# Altium PCB RGB_LED MATRIX.PcbDoc
Units mm, origin at the board's own origin, x right, y up, seen from the top; angles counter-clockwise.
Board outline 50 x 50 mm, 2 copper layers (Top Layer, Bottom Layer), stack 1.595 mm thick; 113 components, 165 nets, 371 pads, 25 vias.
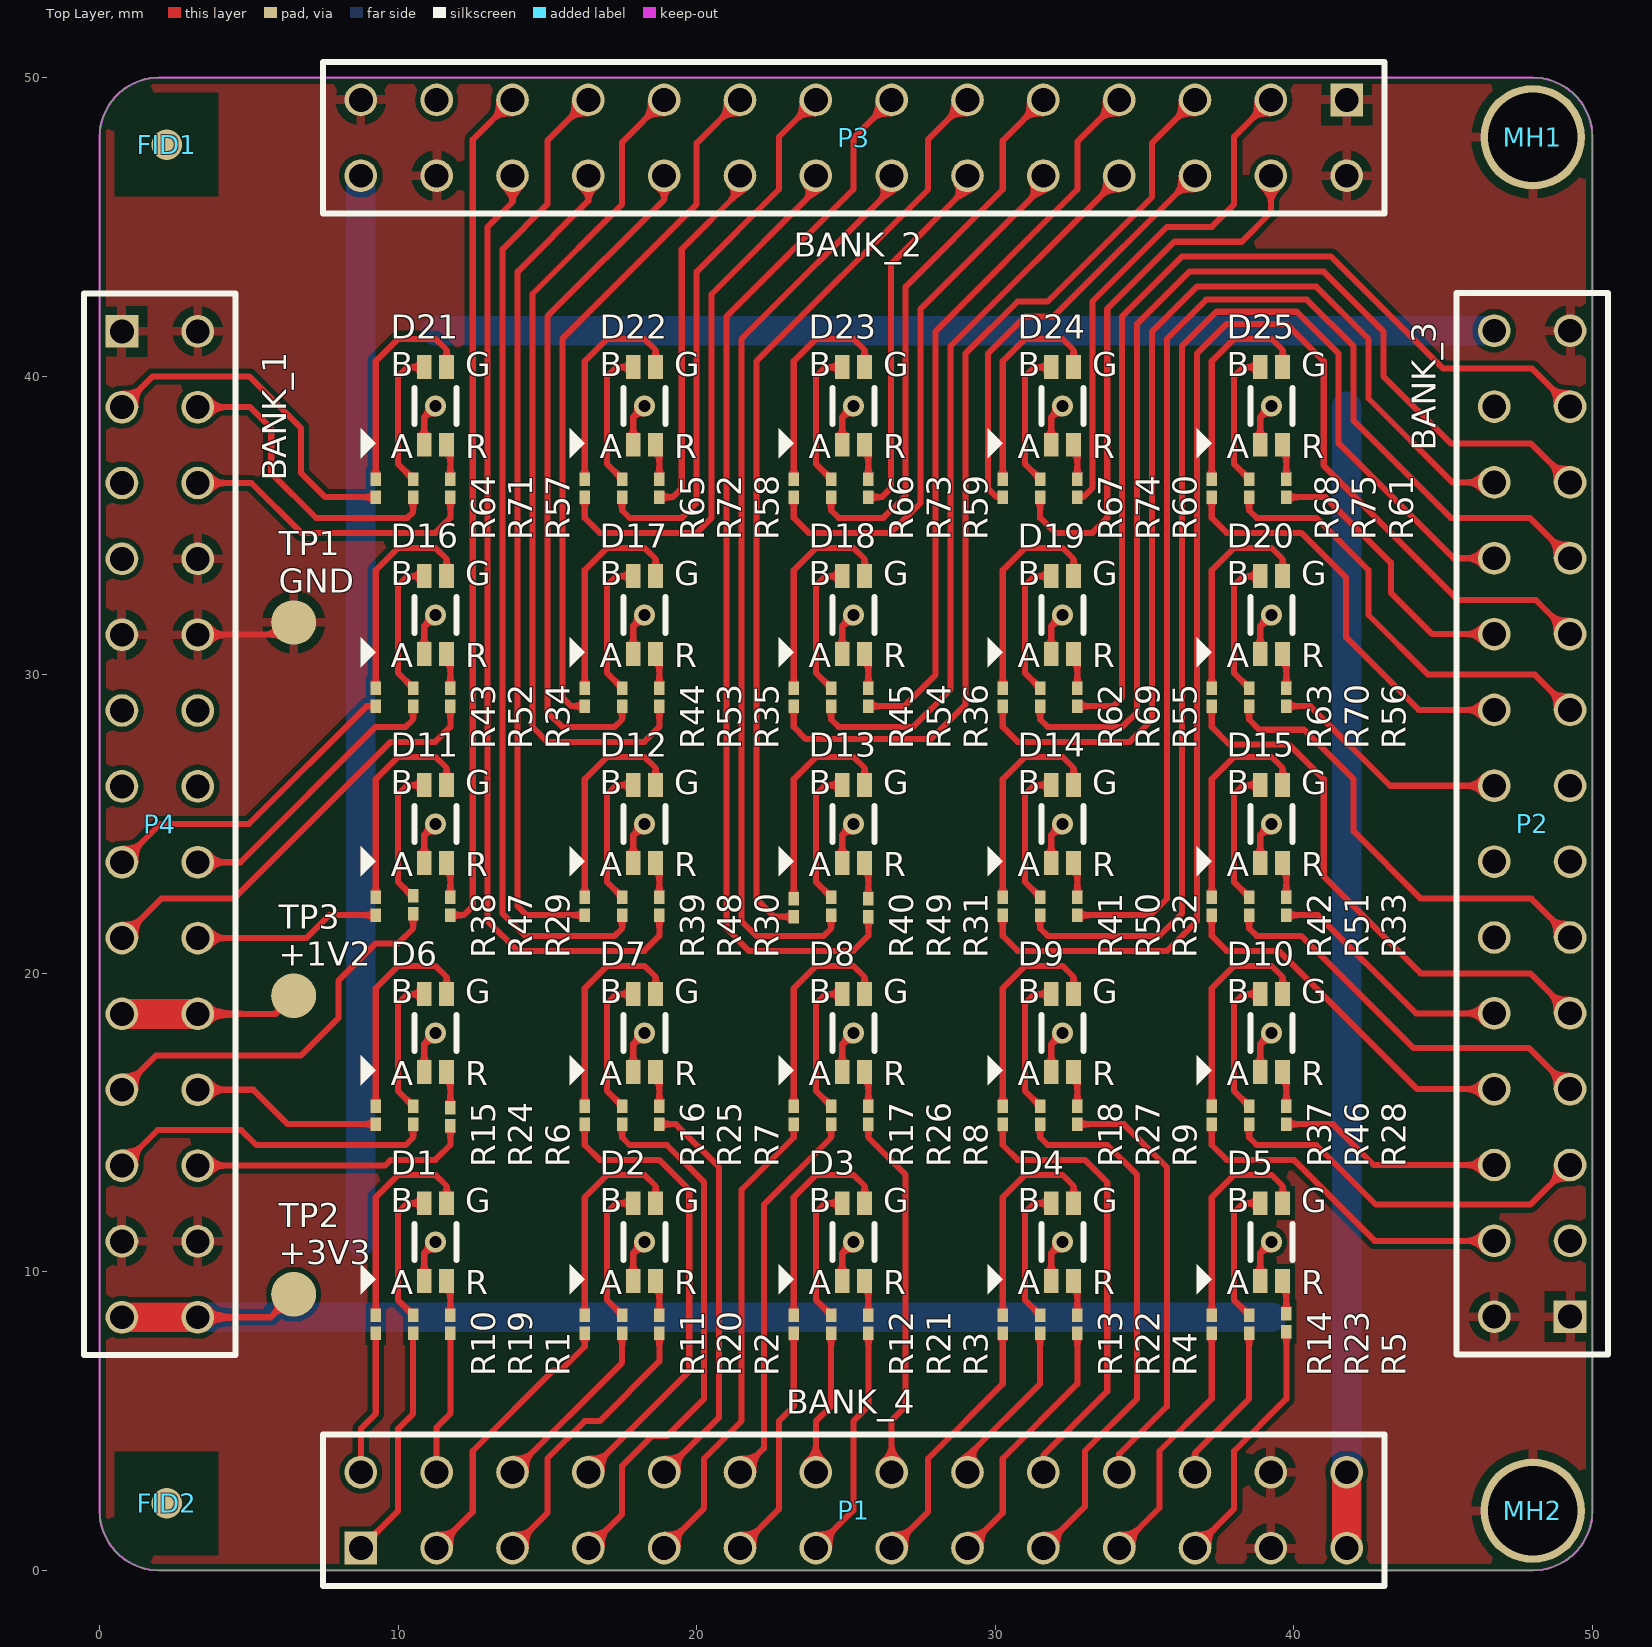
[diagram p0: Top Layer view]
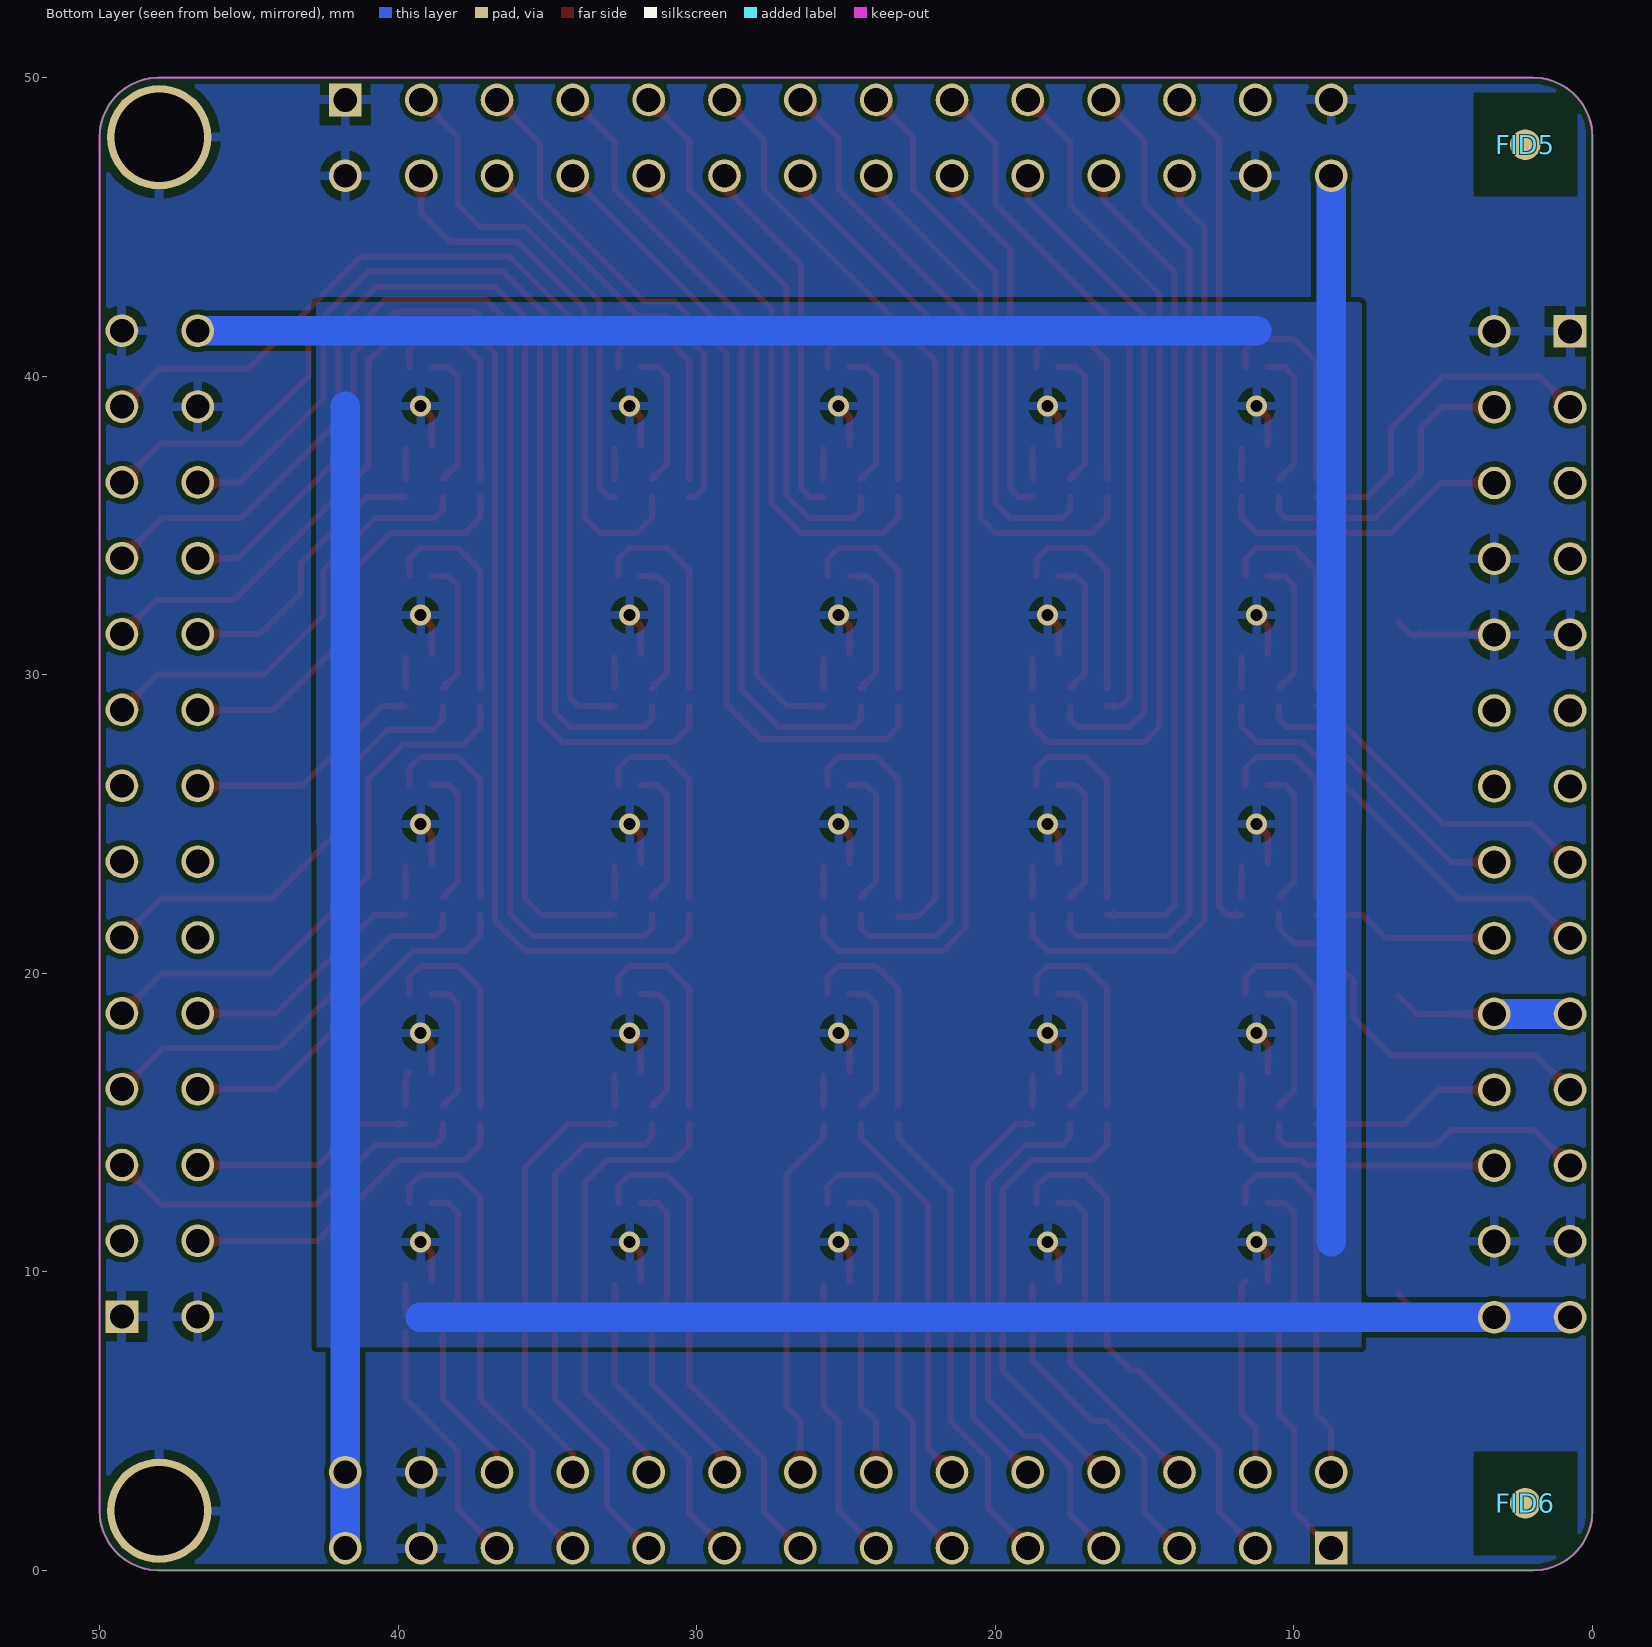
[diagram p1: Bottom Layer view, seen from below]
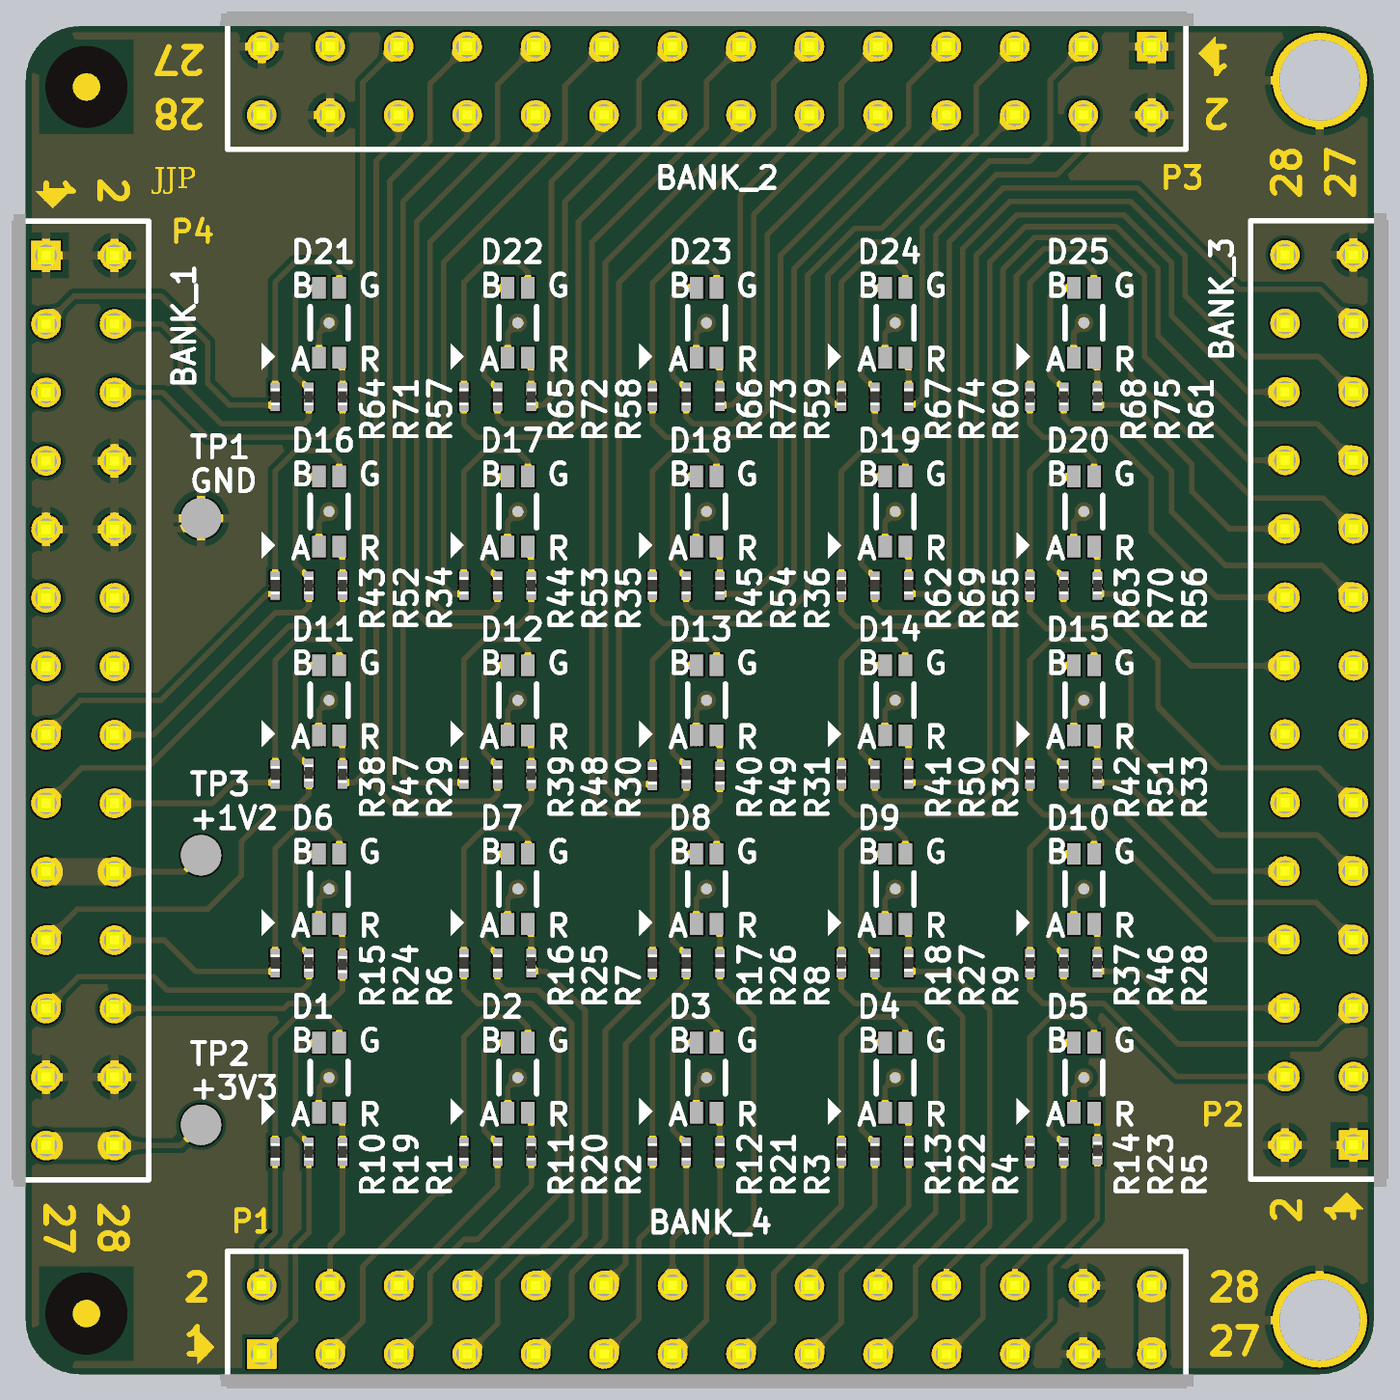
[diagram p2: 3D render of the assembled board from above, using the file's embedded part models]

## Layer stack, top to bottom
Top Solder: solder mask 0.0254, Solder Resist, Dk 3.5
Top Layer: signal copper 0.0356
Dielectric 1: dielectric 1.524, FR-4, Dk 4.5
Bottom Layer: signal copper 0.0356
Bottom Solder: solder mask 0.0254, Solder Resist, Dk 3.5

## Board outline
0,2 0,48 cw(c2,48) 2,50 48,50 cw(c48,48) 50,48 50,2 cw(c48,2) 48,0 2,0 cw(c2,2)

## Design rules (kind name [scope] priority, off if disabled: settings)
Clearance [All] p1: gap=0.178 except(0.152: Track-THPad)
DiffPairsRouting [All] p1: maxlimit=0.254 minlimit=0.152 mostfreqgap=0.254 toplayer_minwidth=0.152 toplayer_maxwidth=0.381 toplayer_prefwidth=0.381 bottomlayer_minwidth=0.152 bottomlayer_maxwidth=0.381 bottomlayer_prefwidth=0.381 maxuncoupledlength=0.254
HoleSize [All] p1: absolutevalues=TRUE maxlimit=5 minlimit=0.3 maxpercent=80.000 minpercent=20.000
MinimumSolderMaskSliver [All] p1: minsoldermaskwidth=0.102
PlaneConnect [All] p1: planeconnectstyle=Relief reliefexpansion=0.3 reliefentries=4 reliefconductorwidth=0.3 reliefairgap=0.4
PolygonConnect [All] p1: connectstyle=Relief reliefconductorwidth=0.3 reliefentries=4 polygonreliefangle="90 Angle" airgapwidth=0.3
RoutingVias [All] p1: holewidth=0.4 width=0.69 viastyle="Through Hole" minholewidth=0.33 minwidth=0.686 maxholewidth=0.711 maxwidth=1.27
SolderMaskExpansion SolderMaskExpansion_RGB_LED [(InComponent('D1') or InComponent('D2') or InComponent('D3') or InComponent('D4') or InComponent('D5') or InComponent('D6') or InComponent('D7') or InComponent('D8') or InComponent('D9') or InComponent('D10') or InComponent('D11') or InComponent('D12') or InComponent('D13') or InComponent('D14') or InComponent('D15') or   InComponent('D16') or InComponent('D17') or InComponent('D18') or InComponent('D19') or InComponent('D20') or InComponent('D21') or InComponent('D22') or InComponent('D23') or InComponent('D24') or InComponent('D25'))] p1: expansion=0.076
SolderMaskExpansion [All] p2: expansion=0.076
Width [All] p1: maxlimit=2.54 minlimit=0.152 preferedwidth=0.254
26 further rules are at their usual default settings.

## Classes and differential pairs
component class "[05] - MECHANICAL": FID1 FID2 FID5 FID6 TP1 TP2 TP3
component class "[04] - RGB LED MATRIX": D1 D2 D3 D4 D5 D6 D7 D8 D9 D10 D11 D12 D13 D14 D15 D16 D17 D18 D19 D20 D21 D22 D23 D24 D25 R1 R2 R3 R4 R5 R6 R7 R8 R9 R10 R11 R12 R13 R14 R15 R16 R17 R18 R19 R20 R21 R22 R23 R24 R25 R26 R27 R28 R29 R30 R31 R32 R33 R34 R35 R36 R37 R38 R39 R40 R41 R42 R43 R44 R45 R46 R47 R48 R49 R50 R51 R52 R53 R54 R55 R56 R57 R58 R59 R60 R61 R62 R63 R64 R65 R66 R67 R68 R69 R70 R71 R72 R73 R74 R75
component class "[03] - CONNECTORS": P1 P2 P3 P4
net class "BANK 1": +1V2 +3V3 GND PIN3 PIN4 PIN7 PIN8 PIN9 PIN17 PIN18 PIN21 PIN22 PIN24 PIN25 PIN26 PIN27 PIN28 PIN30 PIN31 PIN32
net class "BANK 2": +3V3 GND PIN112 PIN113 PIN114 PIN115 PIN118 PIN119 PIN120 PIN121 PIN122 PIN125 PIN126 PIN129 PIN132 PIN133 PIN134 PIN135 PIN136 PIN137 PIN139 PIN141 PIN142 PIN143 PIN144
net class "BANK 3": +3V3 GND PIN73 PIN74 PIN75 PIN76 PIN79 PIN80 PIN81 PIN86 PIN87 PIN88 PIN89 PIN90 PIN91 PIN92 PIN93 PIN94 PIN96 PIN97 PIN99 PIN100 PIN101 PIN103 PIN104
net class "BANK 4": +3V3 GND PIN40 PIN41 PIN42 PIN43 PIN44 PIN45 PIN47 PIN48 PIN51 PIN52 PIN53 PIN55 PIN57 PIN58 PIN59 PIN60 PIN63 PIN64 PIN65 PIN67 PIN69 PIN70 PIN71 PIN72

## Components (designator, comment, footprint, x,y, rotation, side; value= is the part's Value field where it differs from the comment)
D1 "LED RGB" "LED RGB" 11.25,11 r0 top
D2 "LED RGB" "LED RGB" 18.25,11 r0 top
D3 "LED RGB" "LED RGB" 25.25,11 r0 top
D4 "LED RGB" "LED RGB" 32.25,11 r0 top
D5 "LED RGB" "LED RGB" 39.25,11 r0 top
D6 "LED RGB" "LED RGB" 11.25,18 r0 top
D7 "LED RGB" "LED RGB" 18.25,18 r0 top
D8 "LED RGB" "LED RGB" 25.25,18 r0 top
D9 "LED RGB" "LED RGB" 32.25,18 r0 top
D10 "LED RGB" "LED RGB" 39.25,18 r0 top
D11 "LED RGB" "LED RGB" 11.25,25 r0 top
D12 "LED RGB" "LED RGB" 18.25,25 r0 top
D13 "LED RGB" "LED RGB" 25.25,25 r0 top
D14 "LED RGB" "LED RGB" 32.25,25 r0 top
D15 "LED RGB" "LED RGB" 39.25,25 r0 top
D16 "LED RGB" "LED RGB" 11.25,32 r0 top
D17 "LED RGB" "LED RGB" 18.25,32 r0 top
D18 "LED RGB" "LED RGB" 25.25,32 r0 top
D19 "LED RGB" "LED RGB" 32.25,32 r0 top
D20 "LED RGB" "LED RGB" 39.25,32 r0 top
D21 "LED RGB" "LED RGB" 11.25,39 r0 top
D22 "LED RGB" "LED RGB" 18.25,39 r0 top
D23 "LED RGB" "LED RGB" 25.25,39 r0 top
D24 "LED RGB" "LED RGB" 32.25,39 r0 top
D25 "LED RGB" "LED RGB" 39.25,39 r0 top
FID1 "FID_40x120" FID_40x120 2.25,47.75 r0 top
FID2 "FID_40x120" FID_40x120 2.25,2.25 r90 top
FID5 "FID_40x120" FID_40x120 2.25,47.75 r90 bottom
FID6 "FID_40x120" FID_40x120 2.25,2.25 r90 bottom
MH1 "Mounting Hole" MH3#1 47.5,47.5 r0 top
MH2 "Mounting Hole" MH3#2 47.5,2.5 r0 top
P1 "Female Header 14x2 2.54mm 10mm" "Female Header 14x2 2.54mm 10mm" 8.75,0.75 r90 top
P2 "Female Header 14x2 2.54mm 10mm" "Female Header 14x2 2.54mm 10mm" 49.25,8.5 r180 top
P3 "Female Header 14x2 2.54mm 10mm" "Female Header 14x2 2.54mm 10mm" 41.77,49.25 r270 top
P4 "Female Header 14x2 2.54mm 10mm" "Female Header 14x2 2.54mm 10mm" 0.75,41.5 r0 top
R1 "R0201 68R" R0201 11.75,8.25 r270 top
R2 "R0201 68R" R0201 18.75,8.25 r270 top
R3 "R0201 68R" R0201 25.75,8.25 r270 top
R4 "R0201 68R" R0201 32.75,8.25 r270 top
R5 "R0201 68R" R0201 39.75,8.302 r270 top
R6 "R0201 68R" R0201 11.75,15.198 r270 top
R7 "R0201 68R" R0201 18.75,15.25 r270 top
R8 "R0201 68R" R0201 25.75,15.25 r270 top
R9 "R0201 68R" R0201 32.75,15.25 r270 top
R10 "R0201 15R" R0201 9.25,8.25 r270 top
R11 "R0201 15R" R0201 16.25,8.25 r270 top
R12 "R0201 15R" R0201 23.25,8.25 r270 top
R13 "R0201 15R" R0201 30.25,8.25 r270 top
R14 "R0201 15R" R0201 37.25,8.25 r270 top
R15 "R0201 15R" R0201 9.25,15.25 r270 top
R16 "R0201 15R" R0201 16.25,15.25 r270 top
R17 "R0201 15R" R0201 23.25,15.25 r270 top
R18 "R0201 15R" R0201 30.25,15.25 r270 top
R19 "R0201 15R" R0201 10.5,8.25 r270 top
R20 "R0201 15R" R0201 17.5,8.25 r270 top
R21 "R0201 15R" R0201 24.5,8.25 r270 top
R22 "R0201 15R" R0201 31.5,8.25 r270 top
R23 "R0201 15R" R0201 38.5,8.25 r270 top
R24 "R0201 15R" R0201 10.5,15.25 r270 top
R25 "R0201 15R" R0201 17.5,15.25 r270 top
R26 "R0201 15R" R0201 24.5,15.25 r270 top
R27 "R0201 15R" R0201 31.5,15.25 r270 top
R28 "R0201 68R" R0201 39.75,15.25 r270 top
R29 "R0201 68R" R0201 11.75,22.25 r270 top
R30 "R0201 68R" R0201 18.75,22.25 r270 top
R31 "R0201 68R" R0201 25.75,22.198 r270 top
R32 "R0201 68R" R0201 32.75,22.25 r270 top
R33 "R0201 68R" R0201 39.75,22.25 r270 top
R34 "R0201 68R" R0201 11.75,29.25 r270 top
R35 "R0201 68R" R0201 18.75,29.25 r270 top
R36 "R0201 68R" R0201 25.75,29.25 r270 top
R37 "R0201 15R" R0201 37.25,15.25 r270 top
R38 "R0201 15R" R0201 9.25,22.25 r270 top
R39 "R0201 15R" R0201 16.25,22.25 r270 top
R40 "R0201 15R" R0201 23.25,22.198 r270 top
R41 "R0201 15R" R0201 30.25,22.25 r270 top
R42 "R0201 15R" R0201 37.25,22.25 r270 top
R43 "R0201 15R" R0201 9.25,29.25 r270 top
R44 "R0201 15R" R0201 16.25,29.25 r270 top
R45 "R0201 15R" R0201 23.25,29.25 r270 top
R46 "R0201 15R" R0201 38.5,15.25 r270 top
R47 "R0201 15R" R0201 10.5,22.302 r270 top
R48 "R0201 15R" R0201 17.5,22.25 r270 top
R49 "R0201 15R" R0201 24.5,22.25 r270 top
R50 "R0201 15R" R0201 31.5,22.25 r270 top
R51 "R0201 15R" R0201 38.5,22.25 r270 top
R52 "R0201 15R" R0201 10.5,29.25 r270 top
R53 "R0201 15R" R0201 17.5,29.25 r270 top
R54 "R0201 15R" R0201 24.5,29.25 r270 top
R55 "R0201 68R" R0201 32.75,29.25 r270 top
R56 "R0201 68R" R0201 39.75,29.25 r270 top
R57 "R0201 68R" R0201 11.75,36.25 r270 top
R58 "R0201 68R" R0201 18.75,36.25 r270 top
R59 "R0201 68R" R0201 25.75,36.25 r270 top
R60 "R0201 68R" R0201 32.75,36.25 r270 top
R61 "R0201 68R" R0201 39.75,36.25 r270 top
R62 "R0201 15R" R0201 30.25,29.25 r270 top
R63 "R0201 15R" R0201 37.25,29.25 r270 top
R64 "R0201 15R" R0201 9.25,36.25 r270 top
R65 "R0201 15R" R0201 16.25,36.25 r270 top
R66 "R0201 15R" R0201 23.25,36.25 r270 top
R67 "R0201 15R" R0201 30.25,36.25 r270 top
R68 "R0201 15R" R0201 37.25,36.25 r270 top
R69 "R0201 15R" R0201 31.5,29.25 r270 top
R70 "R0201 15R" R0201 38.5,29.25 r270 top
R71 "R0201 15R" R0201 10.5,36.25 r270 top
R72 "R0201 15R" R0201 17.5,36.25 r270 top
R73 "R0201 15R" R0201 24.5,36.25 r270 top
R74 "R0201 15R" R0201 31.5,36.25 r270 top
R75 "R0201 15R" R0201 38.5,36.25 r270 top
TP1 "TP_25MIL" TP_25MIL 6.5,31.75 r90 top
TP2 "TP_25MIL" TP_25MIL 6.5,9.25 r90 top
TP3 "TP_25MIL" TP_25MIL 6.5,19.25 r90 top

## Footprints (in the part's own frame and the unit in brackets; to place one, negate y for a bottom-side part, rotate by r counter-clockwise, add the part's x,y. Pads: shape width x height; smd on the part's side, far side on the other; paste and mask are expansions set on the pad)
"Female Header 14x2 2.54mm 10mm" [mm] "Female Header Strip 14x2 2.54mm 10mm"
  rect 1.095x1.095 hole 0.8: 1(0,0)
  round 1.095 hole 0.8: 2(2.54,0) 3(0,-2.54) 4(2.54,-2.54) 5(0,-5.08) 6(2.54,-5.08) 7(0,-7.62) 8(2.54,-7.62) 9(0,-10.16) 10(2.54,-10.16) 11(0,-12.7) 12(2.54,-12.7) 13(0,-15.24) 14(2.54,-15.24) 15(0,-17.78) 16(2.54,-17.78) 17(0,-20.32) 18(2.54,-20.32) 19(0,-22.86) 20(2.54,-22.86) 21(0,-25.4) 22(2.54,-25.4) 23(0,-27.94) 24(2.54,-27.94) 25(0,-30.48) 26(2.54,-30.48) 27(0,-33.02) 28(2.54,-33.02)
  silkscreen extent -1.27,-34.29 3.81,1.27, body extent -1.27,-34.54 3.81,1.52, height 11.01
FID_40x120 [mil] "Fiducial 40x120"
  round 40 smd paste-40 mask+40: 1(0,0)
"LED RGB" [mm] "LED RGB DIFFUSED 4SMD R/A"
  rect 0.5x0.8 smd: 1(0.375,-1.3) 2(0.375,1.3) 3(-0.375,1.3) 4(-0.375,-1.3)
  silkscreen extent -0.7,-0.6 0.7,0.6, body extent -0.5,-1.6 0.5,1.6, height 1
MH3#1 [mm] "Mounting Hole"
  round 3.5 hole 3: 1(0.5,0.5)
MH3#2 [mm] "Mounting Hole"
  round 3.5 hole 3: 1(0.5,-0.5)
R0201 [mm] "Chip Resistor, 2-Leads, Body 0,60x0,30mm, IPC Medium Density"
  rect 0.45x0.35 smd: 1(-0.302,0) 2(0.302,0)
  body extent -0.32,-0.17 0.32,0.17, height 0.26
TP_25MIL [mm] "Test Point"
  round 1.5 smd: 1(0,0)

## Part data
D1 D2 D3 D4 D5 D6 D7 D8 D9 D10 D11 D12 D13 D14 D15 D16 D17 D18 D19 D20 D21 D22 D23 D24 D25: "LED RGB DIFFUSED 4SMD R/A"
FID1 FID2 FID5 FID6: "Fiducial"
MH1 MH2: library part "MH5 Mounting Hole"
P1 P2 P3 P4: "ELEVATED SOCKET STRIPS"
TP1 TP2 TP3: "Test Point 25mil"

## Via types
v1: diameter 0.69, hole 0.4, Top Layer to Bottom Layer, tented both sides, 25 vias

## Nets (pads, with @x,y where several pads share a name; then routed paths per layer and width w, separated by ;. In a path a pad name is that pad's centre, name@x,y a point inside that pad or via, vN(x,y) a via of type N, cw(c..) or ccw(c..) an arc to the next point about the centre after c; other vN are vias at no path point)
+1V2: P4.19 P4.20 TP3.1 | length 8.5
  Top Layer w0.203: P4.20 5.89,18.64 TP3.1
  Top Layer w1: P4.19 P4.20
  Bottom Layer w1: P4.19 P4.20
+3V3: D1.4 D2.4 D3.4 D4.4 D5.4 D6.4 D7.4 D8.4 D9.4 D10.4 D11.4 D12.4 D13.4 D14.4 D15.4 D16.4 D17.4 D18.4 D19.4 D20.4 D21.4 D22.4 D23.4 D24.4 D25.4 P1.27 P1.28 P2.28 P3.28 P4.27 P4.28 TP2.1 | length 192.9
  Top Layer w0.203: P4.28 5.73,8.48 TP2.1 ; D1.4 10.875,10.625 v1(11.25,11) ; D6.4 10.875,17.625 v1(11.25,18) ; D11.4 10.875,24.625 v1(11.25,25) ; D16.4 10.875,31.625 v1(11.25,32) ; D21.4 10.875,38.625 v1(11.25,39) ; D2.4 17.875,10.625 v1(18.25,11) ; D7.4 17.875,17.625 v1(18.25,18) ; D12.4 17.875,24.625 v1(18.25,25) ; D17.4 17.875,31.625 v1(18.25,32) ; D22.4 17.875,38.625 v1(18.25,39) ; D3.4 24.875,10.625 v1(25.25,11) ; D8.4 24.875,17.625 v1(25.25,18) ; D13.4 24.875,24.625 v1(25.25,25) ; D18.4 24.875,31.625 v1(25.25,32) ; D23.4 24.875,38.625 v1(25.25,39) ; D4.4 31.875,10.625 v1(32.25,11) ; D9.4 31.875,17.625 v1(32.25,18) ; D14.4 31.875,24.625 v1(32.25,25) ; D19.4 31.875,31.625 v1(32.25,32) ; D24.4 31.875,38.625 v1(32.25,39) ; D5.4 38.875,10.625 v1(39.25,11) ; D10.4 38.875,17.625 v1(39.25,18) ; D15.4 38.875,24.625 v1(39.25,25) ; D20.4 38.875,31.625 v1(39.25,32) ; D25.4 38.875,38.625 v1(39.25,39)
  Top Layer w1: P4.27 P4.28 ; P1.27 P1.28
  Bottom Layer w1: P4.27 P4.28 39.25,8.48 ; 8.75,11.02 P3.28 ; 11.25,41.52 P2.28 ; P1.27 P1.28 41.77,38.98
GND: MH1.1 MH2.1 P1.25 P1.26 P2.1 P2.2 P2.26 P2.27 P3.1 P3.2 P3.26 P3.27 P4.1 P4.2 P4.8 P4.9 P4.10 P4.25 P4.26 TP1.1 | length 3.4
  Top Layer w0.203: P4.10 6.09,31.34 TP1.1
NetD1_1: D1.1 R1.1 | length 1.2
  Top Layer w0.203: D1.1 11.75,9.575 R1.1
NetD1_2: D1.2 R10.1 | length 7.4
  Top Layer w0.203: R10.1 9.25,12.5 10,13.25 11.25,13.25 11.625,12.875 D1.2
NetD1_3: D1.3 R19.1 | length 4.7
  Top Layer w0.203: R19.1 10,9.052 10,12 10.3,12.3 D1.3
NetD2_1: D2.1 R2.1 | length 1
  Top Layer w0.203: R2.1 D2.1@18.75,9.575
NetD2_2: D2.2 R11.1 | length 7.4
  Top Layer w0.203: R11.1 16.25,12.5 17,13.25 18.25,13.25 18.625,12.875 D2.2
NetD2_3: D2.3 R20.1 | length 4.7
  Top Layer w0.203: R20.1 17,9.052 17,12 17.3,12.3 D2.3
NetD3_1: D3.1 R3.1 | length 1
  Top Layer w0.203: R3.1 D3.1@25.75,9.575
NetD3_2: D3.2 R12.1 | length 7.4
  Top Layer w0.203: R12.1 23.25,12.5 24,13.25 25.25,13.25 25.625,12.875 D3.2
NetD3_3: D3.3 R21.1 | length 4.7
  Top Layer w0.203: R21.1 24,9.052 24,12 24.3,12.3 D3.3
NetD4_1: D4.1 R4.1 | length 1
  Top Layer w0.203: R4.1 D4.1@32.75,9.575
NetD4_2: D4.2 R13.1 | length 7.4
  Top Layer w0.203: R13.1 30.25,12.5 31,13.25 32.25,13.25 32.625,12.875 D4.2
NetD4_3: D4.3 R22.1 | length 4.7
  Top Layer w0.203: R22.1 31,9.052 31,12 31.3,12.3 D4.3
NetD5_1: D5.1 R5.1 | length 1
  Top Layer w0.203: R5.1@39.75,8.552 R5.1 D5.1@39.75,9.575
NetD5_2: D5.2 R14.1 | length 7.4
  Top Layer w0.203: R14.1 37.25,12.5 38,13.25 39.25,13.25 39.625,12.875 D5.2
NetD5_3: D5.3 R23.1 | length 4.7
  Top Layer w0.203: R23.1 38,9.052 38,12 38.3,12.3 D5.3
NetD6_1: D6.1 R6.1 | length 1
  Top Layer w0.203: R6.1@11.75,15.552 D6.1@11.75,16.575
NetD6_2: D6.2 R15.1 | length 7.4
  Top Layer w0.203: R15.1 9.25,19.5 10,20.25 11.25,20.25 11.625,19.875 D6.2
NetD6_3: D6.3 R24.1 | length 4.7
  Top Layer w0.203: R24.1 10,16.052 10,19 10.3,19.3 D6.3
NetD7_1: D7.1 R7.1 | length 1
  Top Layer w0.203: R7.1 D7.1@18.75,16.575
NetD7_2: D7.2 R16.1 | length 7.4
  Top Layer w0.203: R16.1 16.25,19.5 17,20.25 18.25,20.25 18.625,19.875 D7.2
NetD7_3: D7.3 R25.1 | length 4.7
  Top Layer w0.203: R25.1 17,16.052 17,19 17.3,19.3 D7.3
NetD8_1: D8.1 R8.1 | length 1
  Top Layer w0.203: R8.1 D8.1@25.75,16.575
NetD8_2: D8.2 R17.1 | length 7.4
  Top Layer w0.203: R17.1 23.25,19.5 24,20.25 25.25,20.25 25.625,19.875 D8.2
NetD8_3: D8.3 R26.1 | length 4.7
  Top Layer w0.203: R26.1 24,16.052 24,19 24.3,19.3 D8.3
NetD9_1: D9.1 R9.1 | length 1
  Top Layer w0.203: R9.1 D9.1@32.75,16.575
NetD9_2: D9.2 R18.1 | length 7.4
  Top Layer w0.203: R18.1 30.25,19.5 31,20.25 32.25,20.25 32.625,19.875 D9.2
NetD9_3: D9.3 R27.1 | length 4.7
  Top Layer w0.203: R27.1 31,16.052 31,19 31.3,19.3 D9.3
NetD10_1: D10.1 R28.1 | length 1.2
  Top Layer w0.203: D10.1 39.75,16.575 R28.1
NetD10_2: D10.2 R37.1 | length 7.4
  Top Layer w0.203: R37.1 37.25,19.5 38,20.25 39.25,20.25 39.625,19.875 D10.2
NetD10_3: D10.3 R46.1 | length 4.7
  Top Layer w0.203: R46.1 38,16.052 38,19 38.3,19.3 D10.3
NetD11_1: D11.1 R29.1 | length 1
  Top Layer w0.203: R29.1 D11.1@11.75,23.575
NetD11_2: D11.2 R38.1 | length 7.4
  Top Layer w0.203: R38.1 9.25,26.5 10,27.25 11.25,27.25 11.625,26.875 D11.2
NetD11_3: D11.3 R47.1 | length 4.7
  Top Layer w0.203: R47.1@10.5,22.552 10,23.052 10,26 10.3,26.3 D11.3
NetD12_1: D12.1 R30.1 | length 1
  Top Layer w0.203: R30.1 D12.1@18.75,23.575
NetD12_2: D12.2 R39.1 | length 7.4
  Top Layer w0.203: R39.1 16.25,26.5 17,27.25 18.25,27.25 18.625,26.875 D12.2
NetD12_3: D12.3 R48.1 | length 4.7
  Top Layer w0.203: R48.1 17,23.052 17,26 17.3,26.3 D12.3
NetD13_1: D13.1 R31.1 | length 1
  Top Layer w0.203: R31.1@25.75,22.552 D13.1@25.75,23.575
NetD13_2: D13.2 R40.1 | length 7.4
  Top Layer w0.203: R40.1@23.25,22.552 23.25,26.5 24,27.25 25.25,27.25 25.625,26.875 D13.2
NetD13_3: D13.3 R49.1 | length 4.7
  Top Layer w0.203: R49.1 24,23.052 24,26 24.3,26.3 D13.3
NetD14_1: D14.1 R32.1 | length 1
  Top Layer w0.203: R32.1 D14.1@32.75,23.575
NetD14_2: D14.2 R41.1 | length 7.4
  Top Layer w0.203: R41.1 30.25,26.5 31,27.25 32.25,27.25 32.625,26.875 D14.2
NetD14_3: D14.3 R50.1 | length 4.7
  Top Layer w0.203: R50.1 31,23.052 31,26 31.3,26.3 D14.3
NetD15_1: D15.1 R33.1 | length 1
  Top Layer w0.203: R33.1 D15.1@39.75,23.575
NetD15_2: D15.2 R42.1 | length 7.4
  Top Layer w0.203: R42.1 37.25,26.5 38,27.25 39.25,27.25 39.625,26.875 D15.2
NetD15_3: D15.3 R51.1 | length 4.7
  Top Layer w0.203: R51.1 38,23.052 38,26 38.3,26.3 D15.3
NetD16_1: D16.1 R34.1 | length 1
  Top Layer w0.203: R34.1 D16.1@11.75,30.575
NetD16_2: D16.2 R43.1 | length 7.4
  Top Layer w0.203: R43.1 9.25,33.5 10,34.25 11.25,34.25 11.625,33.875 D16.2
NetD16_3: D16.3 R52.1 | length 4.7
  Top Layer w0.203: R52.1 10,30.052 10,33 10.3,33.3 D16.3
NetD17_1: D17.1 R35.1 | length 1
  Top Layer w0.203: R35.1 D17.1@18.75,30.575
NetD17_2: D17.2 R44.1 | length 7.4
  Top Layer w0.203: R44.1 16.25,33.5 17,34.25 18.25,34.25 18.625,33.875 D17.2
NetD17_3: D17.3 R53.1 | length 4.7
  Top Layer w0.203: R53.1 17,30.052 17,33 17.3,33.3 D17.3
NetD18_1: D18.1 R36.1 | length 1
  Top Layer w0.203: R36.1 D18.1@25.75,30.575
NetD18_2: D18.2 R45.1 | length 7.4
  Top Layer w0.203: R45.1 23.25,33.5 24,34.25 25.25,34.25 25.625,33.875 D18.2
NetD18_3: D18.3 R54.1 | length 4.7
  Top Layer w0.203: R54.1 24,30.052 24,33 24.3,33.3 D18.3
NetD19_1: D19.1 R55.1 | length 1
  Top Layer w0.203: R55.1 D19.1@32.75,30.575
NetD19_2: D19.2 R62.1 | length 7.4
  Top Layer w0.203: R62.1 30.25,33.5 31,34.25 32.25,34.25 32.625,33.875 D19.2
NetD19_3: D19.3 R69.1 | length 4.7
  Top Layer w0.203: R69.1 31,30.052 31,33 31.3,33.3 D19.3
NetD20_1: D20.1 R56.1 | length 1
  Top Layer w0.203: R56.1 D20.1@39.75,30.575
NetD20_2: D20.2 R63.1 | length 7.4
  Top Layer w0.203: R63.1 37.25,33.5 38,34.25 39.25,34.25 39.625,33.875 D20.2
NetD20_3: D20.3 R70.1 | length 4.7
  Top Layer w0.203: R70.1 38,30.052 38,33 38.3,33.3 D20.3
NetD21_1: D21.1 R57.1 | length 1
  Top Layer w0.203: R57.1 D21.1@11.75,37.575
NetD21_2: D21.2 R64.1 | length 7.4
  Top Layer w0.203: R64.1 9.25,40.5 10,41.25 11.25,41.25 11.625,40.875 D21.2
NetD21_3: D21.3 R71.1 | length 4.7
  Top Layer w0.203: R71.1 10,37.052 10,40 10.3,40.3 D21.3
NetD22_1: D22.1 R58.1 | length 1
  Top Layer w0.203: R58.1 D22.1@18.75,37.575
NetD22_2: D22.2 R65.1 | length 7.4
  Top Layer w0.203: R65.1 16.25,40.5 17,41.25 18.25,41.25 18.625,40.875 D22.2
NetD22_3: D22.3 R72.1 | length 4.7
  Top Layer w0.203: R72.1 17,37.052 17,40 17.3,40.3 D22.3
NetD23_1: D23.1 R59.1 | length 1
  Top Layer w0.203: R59.1 D23.1@25.75,37.575
NetD23_2: D23.2 R66.1 | length 7.4
  Top Layer w0.203: R66.1 23.25,40.5 24,41.25 25.25,41.25 25.625,40.875 D23.2
NetD23_3: D23.3 R73.1 | length 4.7
  Top Layer w0.203: R73.1 24,37.052 24,40 24.3,40.3 D23.3
NetD24_1: D24.1 R60.1 | length 1
  Top Layer w0.203: R60.1 D24.1@32.75,37.575
NetD24_2: D24.2 R67.1 | length 7.4
  Top Layer w0.203: R67.1 30.25,40.5 31,41.25 32.25,41.25 32.625,40.875 D24.2
NetD24_3: D24.3 R74.1 | length 4.7
  Top Layer w0.203: R74.1 31,37.052 31,40 31.3,40.3 D24.3
NetD25_1: D25.1 R61.1 | length 1
  Top Layer w0.203: R61.1 D25.1@39.75,37.575
NetD25_2: D25.2 R68.1 | length 7.4
  Top Layer w0.203: R68.1 37.25,40.5 38,41.25 39.25,41.25 39.625,40.875 D25.2
NetD25_3: D25.3 R75.1 | length 4.7
  Top Layer w0.203: R75.1 38,37.052 38,40 38.3,40.3 D25.3
PIN3: P4.3 R64.2 | length 11.5
  Top Layer w0.203: P4.3 1.779,39.989 5.011,39.989 6.75,38.25 6.75,36.75 7.552,35.948 R64.2
PIN4: P4.4 R71.2 | length 10.2
  Top Layer w0.203: P4.4 5.04,38.96 5.75,38.25 5.75,36.75 7.25,35.25 10.306,35.25 10.5,35.444 R71.2
PIN7: P4.5
PIN8: P4.6 R57.2 | length 10.1
  Top Layer w0.203: P4.6 5.08,36.42 6.75,34.75 11.25,34.75 11.75,35.25 R57.2
PIN9: P4.7
PIN17: P4.11
PIN18: P4.12
PIN21: P4.14
PIN22: P4.13
PIN24: P4.16 R52.2 | length 9.6
  Top Layer w0.203: P4.16 4.72,23.72 9.25,28.25 10.25,28.25 10.5,28.5 R52.2
PIN25: P4.15 R43.2 | length 10.7
  Top Layer w0.203: P4.15 2.03,25 5,25 8.948,28.948 R43.2
PIN26: P4.18 R38.2 | length 6.3
  Top Layer w0.203: P4.18 6.93,21.18 7.698,21.948 R38.2
PIN27: P4.17 R34.2 | length 14.6
  Top Layer w0.203: P4.17 2.07,22.5 4.5,22.5 9.75,27.75 11.25,27.75 11.75,28.25 R34.2
PIN28: P4.22 R15.2 | length 6.4
  Top Layer w0.203: P4.22 5.15,16.1 6.302,14.948 R15.2
PIN30: P4.21 R47.2 | length 13.2
  Top Layer w0.203: P4.21 1.9,17.25 6.75,17.25 8,18.5 8,19.75 9.25,21 10,21 10.5,21.5 R47.2
PIN31: P4.24 R6.2 | length 9.4
  Top Layer w0.203: P4.24 9.56,13.56 9.75,13.75 11.25,13.75 11.75,14.25 R6.2
PIN32: P4.23 R24.2 | length 11
  Top Layer w0.203: P4.23 1.94,14.75 4.75,14.75 5.25,14.25 10.25,14.25 10.5,14.5 R24.2
PIN40: P1.1 R19.2 | length 7.9
  Top Layer w0.203: P1.1 10,2 10,4.75 10.5,5.25 R19.2
PIN41: P1.2 R10.2 | length 4.9
  Top Layer w0.203: P1.2 8.75,4.75 9.25,5.25 R10.2
PIN42: P1.3 R11.2 | length 9.4
  Top Layer w0.203: P1.3 12.5,1.96 12.5,4 15.198,6.698 15.448,6.698 16.25,7.5 R11.2
PIN43: P1.4 R1.2 | length 4.8
  Top Layer w0.203: P1.4 11.29,4.79 11.75,5.25 R1.2
PIN44: P1.5 R2.2 | length 9.5
  Top Layer w0.203: P1.5 15,1.92 15,3.75 16.25,5 16.75,5 18.75,7 R2.2
PIN45: P1.6 R20.2 | length 6.2
  Top Layer w0.203: P1.6 17.5,6.96 R20.2
PIN47: P1.7 R25.2 | length 18
  Top Layer w0.203: P1.7 17.5,1.88 17.5,3.5 18.5,4.5 19,4.5 20.25,5.75 20.25,13 19,14.25 17.75,14.25 17.5,14.5 R25.2
PIN48: P1.8 R16.2 | length 15.7
  Top Layer w0.203: R16.2 16.25,14.25 16.75,13.75 18.75,13.75 19.75,12.75 19.75,6.67 P1.8
PIN51: P1.9 R17.2 | length 16
  Top Layer w0.203: P1.9 20.25,2.09 20.25,3.75 21.5,5 21.5,12.75 23.25,14.5 R17.2
PIN52: P1.10 R7.2 | length 13.6
  Top Layer w0.203: R7.2 19.302,14.948 20.75,13.5 20.75,5.13 P1.10
PIN53: P1.11 R12.2 | length 7.9
  Top Layer w0.203: P1.11 22.75,2.05 22.75,5 23.25,5.5 R12.2
PIN55: P1.12 R26.2 | length 12.9
  Top Layer w0.203: P1.12 22.25,4.09 22.25,12.25 24.5,14.5 R26.2
PIN57: P1.13 R3.2 | length 7.9
  Top Layer w0.203: P1.13 25.25,2.01 25.25,5 25.75,5.5 R3.2
PIN58: P1.14 R21.2 | length 4.9
  Top Layer w0.203: P1.14 23.99,4.99 24.5,5.5 R21.2
PIN59: P1.15 R13.2 | length 8.7
  Top Layer w0.203: P1.15 27.75,1.97 27.75,3.75 30.25,6.25 R13.2
PIN60: P1.16 R8.2 | length 12.4
  Top Layer w0.203: R8.2 25.75,14.5 27,13.25 27,5.5 26.53,5.03 P1.16
PIN63: P1.17 R4.2 | length 8.7
  Top Layer w0.203: P1.17 30.25,1.93 30.25,3.75 32.75,6.25 R4.2
PIN64: P1.18 R22.2 | length 5.7
  Top Layer w0.203: P1.18 29.07,3.82 31.5,6.25 R22.2
PIN65: P1.19 R27.2 | length 18
  Top Layer w0.203: R27.2 31.5,14.5 31.75,14.25 33.75,14.25 34.75,13.25 34.75,5.75 33,4 33,2.14 P1.19
PIN67: P1.20 R18.2 | length 15.3
  Top Layer w0.203: R18.2 30.25,14.25 30.75,13.75 33,13.75 33.75,13 33.75,6 31.61,3.86 P1.20
PIN69: P1.21 R14.2 | length 8.5
  Top Layer w0.203: P1.21 35.5,2.1 35.5,4 37.25,5.75 R14.2
PIN70: P1.22 R9.2 | length 14.5
  Top Layer w0.203: R9.2 34.302,14.948 35.75,13.5 35.75,5.5 34.15,3.9 P1.22
PIN71: P1.23 R5.2 | length 8.5
  Top Layer w0.203: P1.23 38,2.06 38,4 39.75,5.75 R5.2
PIN72: P1.24 R23.2 | length 5.4
  Top Layer w0.203: P1.24 36.69,3.94 38.5,5.75 R23.2
PIN73: P2.3
PIN74: P2.4 R37.2 | length 11.5
  Top Layer w0.203: R37.2 37.25,14.25 37.75,13.75 39,13.75 40,13.75 42.71,11.04 P2.4
PIN75: P2.5 R46.2 | length 12.7
  Top Layer w0.203: R46.2 38.5,14.5 38.75,14.25 40.75,14.25 42.75,12.25 47.92,12.25 P2.5
PIN76: P2.6 R28.2 | length 7.5
  Top Layer w0.203: R28.2 41.302,14.948 42.67,13.58 P2.6
PIN79: P2.7 R51.2 | length 13.4
  Top Layer w0.203: R51.2 38.5,21.5 38.75,21.25 40.25,21.25 44,17.5 47.87,17.5 P2.7
PIN80: P2.8 R42.2 | length 12.3
  Top Layer w0.203: R42.2 37.25,21.25 37.75,20.75 39.5,20.75 44.13,16.12 P2.8
PIN81: P2.9 R63.2 | length 18.6
  Top Layer w0.203: R63.2 37.25,28.25 37.844,27.656 39.844,27.656 41,26.5 41,23.25 44.25,20 47.91,20 P2.9
PIN86: P2.10 R33.2 | length 8.3
  Top Layer w0.203: R33.2 40.802,21.948 44.09,18.66 P2.10
PIN87: P2.11 R70.2 | length 15.2
  Top Layer w0.203: R70.2 38.5,28.5 38.844,28.156 40.344,28.156 42,26.5 42,24.75 44.25,22.5 47.95,22.5 P2.11
PIN88: P2.12
PIN89: P2.13
PIN90: P2.14
PIN91: P2.15
PIN92: P2.16 R56.2 | length 8.1
  Top Layer w0.203: R56.2 40.552,28.948 43.22,26.28 P2.16
PIN93: P2.17 R75.2 | length 14.8
  Top Layer w0.203: R75.2 38.5,35.5 38.75,35.25 40.75,35.25 42.5,33.5 42.5,32 44.5,30 48.07,30 P2.17
PIN94: P2.18 R68.2 | length 14
  Top Layer w0.203: R68.2 37.25,35.25 37.75,34.75 40.25,34.75 41.75,33.25 41.75,31.25 44.18,28.82 P2.18
PIN96: P2.19 R41.2 | length 46.1
  Top Layer w0.203: R41.2 30.25,21.25 30.75,20.75 35.75,20.75 36.75,21.75 36.75,40.75 37.75,41.75 39.75,41.75 41,40.5 41,37 45.5,32.5 48.11,32.5 P2.19
PIN97: P2.20 R61.2 | length 9.4
  Top Layer w0.203: R61.2 41.052,35.948 43.25,33.75 43.25,32.75 44.64,31.36 P2.20
PIN99: P2.21 R32.2 | length 41.1
  Top Layer w0.203: R32.2 35.198,21.948 35.75,22.5 35.75,41.25 37.063,42.563 40.437,42.563 42,41 42,38.5 45.25,35.25 47.9,35.25 P2.21
PIN100: P2.22 R50.2 | length 40.7
  Top Layer w0.203: R50.2 31.5,21.5 31.75,21.25 35.5,21.25 36.25,22 36.25,41 37.406,42.156 40.094,42.156 41.5,40.75 41.5,37.75 45.35,33.9 P2.22
PIN101: P2.23 R69.2 | length 36
  Top Layer w0.203: R69.2 31.5,28.5 31.75,28.25 34.25,28.25 34.75,28.75 34.75,41.75 36.5,43.5 41,43.5 43,41.5 43,40 45.25,37.75 47.94,37.75 P2.23
PIN103: P2.24 R62.2 | length 35.2
  Top Layer w0.203: R62.2 30.25,28.25 30.75,27.75 34.5,27.75 35.25,28.5 35.25,41.5 36.75,43 40.75,43 42.5,41.25 42.5,39.25 45.31,36.44 P2.24
PIN104: P2.25 R55.2 | length 32.3
  Top Layer w0.203: R55.2 33.948,28.948 34.25,29.25 34.25,42 36.25,44 41.25,44 45,40.25 47.98,40.25 P2.25
PIN112: P3.3 R60.2 | length 17
  Top Layer w0.203: R60.2 32.948,35.948 33.25,36.25 33.25,42.5 35.75,45 37.25,45 38,45.75 38,48.02 P3.3
PIN113: P3.4 R74.2 | length 18.4
  Top Layer w0.203: R74.2 31.5,35.25 32,34.75 33.25,34.75 33.75,35.25 33.75,42.25 36,44.5 38.25,44.5 39.23,45.48 P3.4
PIN114: P3.5 R45.2 | length 31.1
  Top Layer w0.203: R45.2 23.25,28.25 23.656,27.844 27.844,27.844 29,29 29,40.75 30.75,42.5 31.75,42.5 35.25,46 35.25,47.81 P3.5
PIN115: P3.6 R67.2 | length 14.5
  Top Layer w0.203: R67.2 30.052,35.948 29.75,36.25 29.75,40.75 31,42 31.96,42 P3.6@36.68,46.72
PIN118: P3.7 R36.2 | length 24.5
  Top Layer w0.203: R36.2 26.948,28.948 28,30 28,41.5 32.75,46.25 32.75,47.85 P3.7
PIN119: P3.8 R54.2 | length 24.6
  Top Layer w0.203: R54.2 24.5,28.5 24.75,28.25 27.25,28.25 28.5,29.5 28.5,41 34.15,46.65 P3.8
PIN120: P3.9 R73.2 | length 18.5
  Top Layer w0.203: R73.2 24.5,35.5 24.75,35.25 26.25,35.25 27,36 27,43 30.25,46.25 30.25,47.89 P3.9
PIN121: P3.10 R66.2 | length 18.2
  Top Layer w0.203: R66.2 23.25,35.25 23.75,34.75 26.5,34.75 27.5,35.75 27.5,42.25 31.61,46.36 P3.10
PIN122: P3.11 R40.2 | length 31.2
  Top Layer w0.203: R40.2 22.604,21.896 22,22.5 22,40.5 27.75,46.25 27.75,47.93 P3.11
PIN125: P3.12 R59.2 | length 12.4
  Top Layer w0.203: R59.2 26.198,35.948 26.5,36.25 26.5,43.75 29.07,46.32 P3.12
PIN126: P3.13 R31.2 | length 36
  Top Layer w0.203: R31.2 25.75,21.25 25.25,20.75 21.75,20.75 21,21.5 21,42 25.25,46.25 25.25,47.97 P3.13
PIN129: P3.14 R49.2 | length 30.8
  Top Layer w0.203: R49.2 24.5,21.5 24.25,21.25 22,21.25 21.5,21.75 21.5,41.25 26.53,46.28 P3.14
PIN132: P3.15 R72.2 | length 18.4
  Top Layer w0.203: R72.2 17.5,35.5 17.75,35.25 19.5,35.25 20,35.75 20,43.5 22.75,46.25 22.75,48.01 P3.15
PIN133: P3.16 R65.2 | length 18.3
  Top Layer w0.203: R65.2 16.25,35.25 16.75,34.75 20,34.75 20.5,35.25 20.5,42.75 23.99,46.24 P3.16
PIN134: P3.17 R44.2 | length 23.3
  Top Layer w0.203: R44.2 15.802,28.948 15.5,29.25 15.5,41.25 20,45.75 20,47.8 P3.17
PIN135: P3.18 R58.2 | length 12.1
  Top Layer w0.203: R58.2 19.198,35.948 19.5,36.25 19.5,44.25 21.45,46.2 P3.18
PIN136: P3.19 R35.2 | length 28.2
  Top Layer w0.203: R35.2 18.75,28.25 18.25,27.75 15,27.75 14.5,28.25 14.5,42.75 17.5,45.75 17.5,47.84 P3.19
PIN137: P3.20 R53.2 | length 22.8
  Top Layer w0.203: R53.2 17.5,28.5 17.25,28.25 15.5,28.25 15,28.75 15,42 18.91,45.91 P3.20
PIN139: P3.21 R48.2 | length 33.3
  Top Layer w0.203: P3.21 15,47.88 15,45.75 13.5,44.25 13.5,22 14.25,21.25 17.25,21.25 17.5,21.5 R48.2
PIN141: P3.22 R39.2 | length 27.8
  Top Layer w0.203: R39.2 14.302,21.948 14,22.25 14,43.5 16.37,45.87 P3.22
PIN142: P3.23 R29.2 | length 28.4
  Top Layer w0.203: R29.2 12.198,21.948 12.5,22.25 12.5,47.92 P3.23
PIN143: P3.24 R30.2 | length 32.4
  Top Layer w0.203: P3.24 13.83,45.83 13,45 13,21.75 14,20.75 18.25,20.75 18.75,21.25 R30.2
PIN144: P3.25
pads on no net: FID1.1 FID2.1 FID5.1 FID6.1

## Polygon pours and split planes (outlines as drawn)
+3V3 on Bottom Layer "+3V3" (solid, remove dead copper, pour order 4): 42.73,7.48 7.75,7.48 7.73,42.48 42.75,42.48
GND on Bottom Layer "GND" (solid, remove dead copper, pour order 6): -6.25,-7 54.25,-7 54.25,54 -6.25,54
GND on Top Layer "GND" (solid, remove dead copper, pour order 2): -2.588,-2.838 53.36,-2.838 53.36,53.11 -2.588,53.11

## Keep-outs
Keep-Out Layer:
  the board outline again, w0.076

## Other copper
Top Layer:
  pour cut-out: 4,0.5 4,4 0.5,4 0.5,0.5
  pour cut-out: 4,46 4,49.5 0.5,49.5 0.5,46
Bottom Layer:
  pour cut-out: 0.5,46 0.5,49.5 4,49.5 4,46
  pour cut-out: 0.5,0.5 0.5,4 4,4 4,0.5

## Silkscreen, mask and mechanical layers (free items; w line width, h text height)
Top Overlay:
  region: 36.75,38.25 36.75,37.25 37.25,37.75
  region: 29.75,38.25 29.75,37.25 30.25,37.75
  region: 22.75,38.25 22.75,37.25 23.25,37.75
  region: 15.75,38.25 15.75,37.25 16.25,37.75
  region: 8.75,38.25 8.75,37.25 9.25,37.75
  region: 8.75,31.25 8.75,30.25 9.25,30.75
  region: 15.75,31.25 15.75,30.25 16.25,30.75
  region: 22.75,31.25 22.75,30.25 23.25,30.75
  region: 29.75,31.25 29.75,30.25 30.25,30.75
  region: 36.75,31.25 36.75,30.25 37.25,30.75
  region: 36.75,24.25 36.75,23.25 37.25,23.75
  region: 29.75,24.25 29.75,23.25 30.25,23.75
  region: 22.75,24.25 22.75,23.25 23.25,23.75
  region: 15.75,24.25 15.75,23.25 16.25,23.75
  region: 8.75,24.25 8.75,23.25 9.25,23.75
  region: 8.75,17.25 8.75,16.25 9.25,16.75
  region: 15.75,17.25 15.75,16.25 16.25,16.75
  region: 22.75,17.25 22.75,16.25 23.25,16.75
  region: 29.75,17.25 29.75,16.25 30.25,16.75
  region: 36.75,17.25 36.75,16.25 37.25,16.75
  region: 36.75,10.25 36.75,9.25 37.25,9.75
  region: 29.75,10.25 29.75,9.25 30.25,9.75
  region: 8.75,10.25 8.75,9.25 9.25,9.75
  region: 15.75,10.25 15.75,9.25 16.25,9.75
  region: 22.75,10.25 22.75,9.25 23.25,9.75
  text "BANK_2" at 23.25,44 h0.81
  text "BANK_3" at 44.75,37.5 h0.81 r90
  text "BANK_1" at 6.25,36.5 h0.81 r90
  text "GND" at 6,32.75 h0.81
  text "+1V2" at 6,20.25 h0.81
  text "+3V3" at 6,10.25 h0.81
  text "BANK_4" at 23,5.25 h0.81
Top Solder:
  region: 44.135,48.365 44.135,49.635 43.5,49
  region: 1.635,43.885 0.365,43.885 1,43.25
  region: 48.365,6.115 49.635,6.115 49,6.75
  region: 6.365,1.635 6.365,0.365 7,1
  text "JJP" at 4.75,44 h1.52
Bottom Solder:
  drawing of 3806 lines, arcs and shapes, not listed
  text "JJP" at 7.75,44 h1.52
  text "RGB LED Matrix  / for EP2C5T144mini PCB" at 35,35 h2
  text "10/2017" at 18.75,12 h2
  text "V1I2" at 38.75,12 h2

## Dimensions
0,0 to 41.77,49.25 on Mechanical 15
0,0 to 41.77,49.25 on Mechanical 15
0,0 to 0.75,41.5 on Mechanical 15
0,0 to 49.25,8.5 on Mechanical 15
0,0 to 8.75,0.75 on Mechanical 15
2,0 to 2,50 on Keep-Out Layer
0,2 to 50,2 on Keep-Out Layer

## Text inside footprints (layer, text, board x,y; h text height)
D1: Top Overlay "R" at 12.25,9.25 h0.81; Top Overlay "G" at 12.25,12 h0.81; Top Overlay "B" at 9.75,12 h0.81; Top Overlay "A" at 9.75,9.25 h0.81
D2: Top Overlay "R" at 19.25,9.25 h0.81; Top Overlay "G" at 19.25,12 h0.81; Top Overlay "B" at 16.75,12 h0.81; Top Overlay "A" at 16.75,9.25 h0.81
D3: Top Overlay "R" at 26.25,9.25 h0.81; Top Overlay "G" at 26.25,12 h0.81; Top Overlay "B" at 23.75,12 h0.81; Top Overlay "A" at 23.75,9.25 h0.81
D4: Top Overlay "R" at 33.25,9.25 h0.81; Top Overlay "G" at 33.25,12 h0.81; Top Overlay "B" at 30.75,12 h0.81; Top Overlay "A" at 30.75,9.25 h0.81
D5: Top Overlay "R" at 40.25,9.25 h0.81; Top Overlay "G" at 40.25,12 h0.81; Top Overlay "B" at 37.75,12 h0.81; Top Overlay "A" at 37.75,9.25 h0.81
D6: Top Overlay "R" at 12.25,16.25 h0.81; Top Overlay "G" at 12.25,19 h0.81; Top Overlay "B" at 9.75,19 h0.81; Top Overlay "A" at 9.75,16.25 h0.81
D7: Top Overlay "R" at 19.25,16.25 h0.81; Top Overlay "G" at 19.25,19 h0.81; Top Overlay "B" at 16.75,19 h0.81; Top Overlay "A" at 16.75,16.25 h0.81
D8: Top Overlay "R" at 26.25,16.25 h0.81; Top Overlay "G" at 26.25,19 h0.81; Top Overlay "B" at 23.75,19 h0.81; Top Overlay "A" at 23.75,16.25 h0.81
D9: Top Overlay "R" at 33.25,16.25 h0.81; Top Overlay "G" at 33.25,19 h0.81; Top Overlay "B" at 30.75,19 h0.81; Top Overlay "A" at 30.75,16.25 h0.81
D10: Top Overlay "R" at 40.25,16.25 h0.81; Top Overlay "G" at 40.25,19 h0.81; Top Overlay "B" at 37.75,19 h0.81; Top Overlay "A" at 37.75,16.25 h0.81
D11: Top Overlay "R" at 12.25,23.25 h0.81; Top Overlay "G" at 12.25,26 h0.81; Top Overlay "B" at 9.75,26 h0.81; Top Overlay "A" at 9.75,23.25 h0.81
D12: Top Overlay "R" at 19.25,23.25 h0.81; Top Overlay "G" at 19.25,26 h0.81; Top Overlay "B" at 16.75,26 h0.81; Top Overlay "A" at 16.75,23.25 h0.81
D13: Top Overlay "R" at 26.25,23.25 h0.81; Top Overlay "G" at 26.25,26 h0.81; Top Overlay "B" at 23.75,26 h0.81; Top Overlay "A" at 23.75,23.25 h0.81
D14: Top Overlay "R" at 33.25,23.25 h0.81; Top Overlay "G" at 33.25,26 h0.81; Top Overlay "B" at 30.75,26 h0.81; Top Overlay "A" at 30.75,23.25 h0.81
D15: Top Overlay "R" at 40.25,23.25 h0.81; Top Overlay "G" at 40.25,26 h0.81; Top Overlay "B" at 37.75,26 h0.81; Top Overlay "A" at 37.75,23.25 h0.81
D16: Top Overlay "R" at 12.25,30.25 h0.81; Top Overlay "G" at 12.25,33 h0.81; Top Overlay "B" at 9.75,33 h0.81; Top Overlay "A" at 9.75,30.25 h0.81
D17: Top Overlay "R" at 19.25,30.25 h0.81; Top Overlay "G" at 19.25,33 h0.81; Top Overlay "B" at 16.75,33 h0.81; Top Overlay "A" at 16.75,30.25 h0.81
D18: Top Overlay "R" at 26.25,30.25 h0.81; Top Overlay "G" at 26.25,33 h0.81; Top Overlay "B" at 23.75,33 h0.81; Top Overlay "A" at 23.75,30.25 h0.81
D19: Top Overlay "R" at 33.25,30.25 h0.81; Top Overlay "G" at 33.25,33 h0.81; Top Overlay "B" at 30.75,33 h0.81; Top Overlay "A" at 30.75,30.25 h0.81
D20: Top Overlay "R" at 40.25,30.25 h0.81; Top Overlay "G" at 40.25,33 h0.81; Top Overlay "B" at 37.75,33 h0.81; Top Overlay "A" at 37.75,30.25 h0.81
D21: Top Overlay "R" at 12.25,37.25 h0.81; Top Overlay "G" at 12.25,40 h0.81; Top Overlay "B" at 9.75,40 h0.81; Top Overlay "A" at 9.75,37.25 h0.81
D22: Top Overlay "R" at 19.25,37.25 h0.81; Top Overlay "G" at 19.25,40 h0.81; Top Overlay "B" at 16.75,40 h0.81; Top Overlay "A" at 16.75,37.25 h0.81
D23: Top Overlay "R" at 26.25,37.25 h0.81; Top Overlay "G" at 26.25,40 h0.81; Top Overlay "B" at 23.75,40 h0.81; Top Overlay "A" at 23.75,37.25 h0.81
D24: Top Overlay "R" at 33.25,37.25 h0.81; Top Overlay "G" at 33.25,40 h0.81; Top Overlay "B" at 30.75,40 h0.81; Top Overlay "A" at 30.75,37.25 h0.81
D25: Top Overlay "R" at 40.25,37.25 h0.81; Top Overlay "G" at 40.25,40 h0.81; Top Overlay "B" at 37.75,40 h0.81; Top Overlay "A" at 37.75,37.25 h0.81
P1: Top Solder "27" at 43.75,0.75 h1; Top Solder "28" at 43.75,2.75 h1; Top Solder "1" at 5.75,0.75 h1; Top Solder "2" at 5.75,2.75 h1
P2: Top Solder "28" at 47.25,43.5 h1 r90; Top Solder "27" at 49.25,43.5 h1 r90; Top Solder "1" at 49.25,5.5 h1 r90; Top Solder "2" at 47.25,5.5 h1 r90
P3: Top Solder "28" at 6.77,47.25 h1 r180; Top Solder "27" at 6.77,49.25 h1 r180; Top Solder "1" at 44.77,49.25 h1 r180; Top Solder "2" at 44.77,47.25 h1 r180
P4: Top Solder "27" at 0.75,6.5 h1 r270; Top Solder "28" at 2.75,6.5 h1 r270; Top Solder "1" at 0.75,44.5 h1 r270; Top Solder "2" at 2.75,44.5 h1 r270